# Altium PCB PCB.PcbDoc
Units mil, origin at the board's own origin, x right, y up, seen from the top; angles counter-clockwise.
Board outline 2500 x 2500 mil, 2 copper layers (Top Layer, Bottom Layer); 20 components, 37 nets, 102 pads, 98 vias.
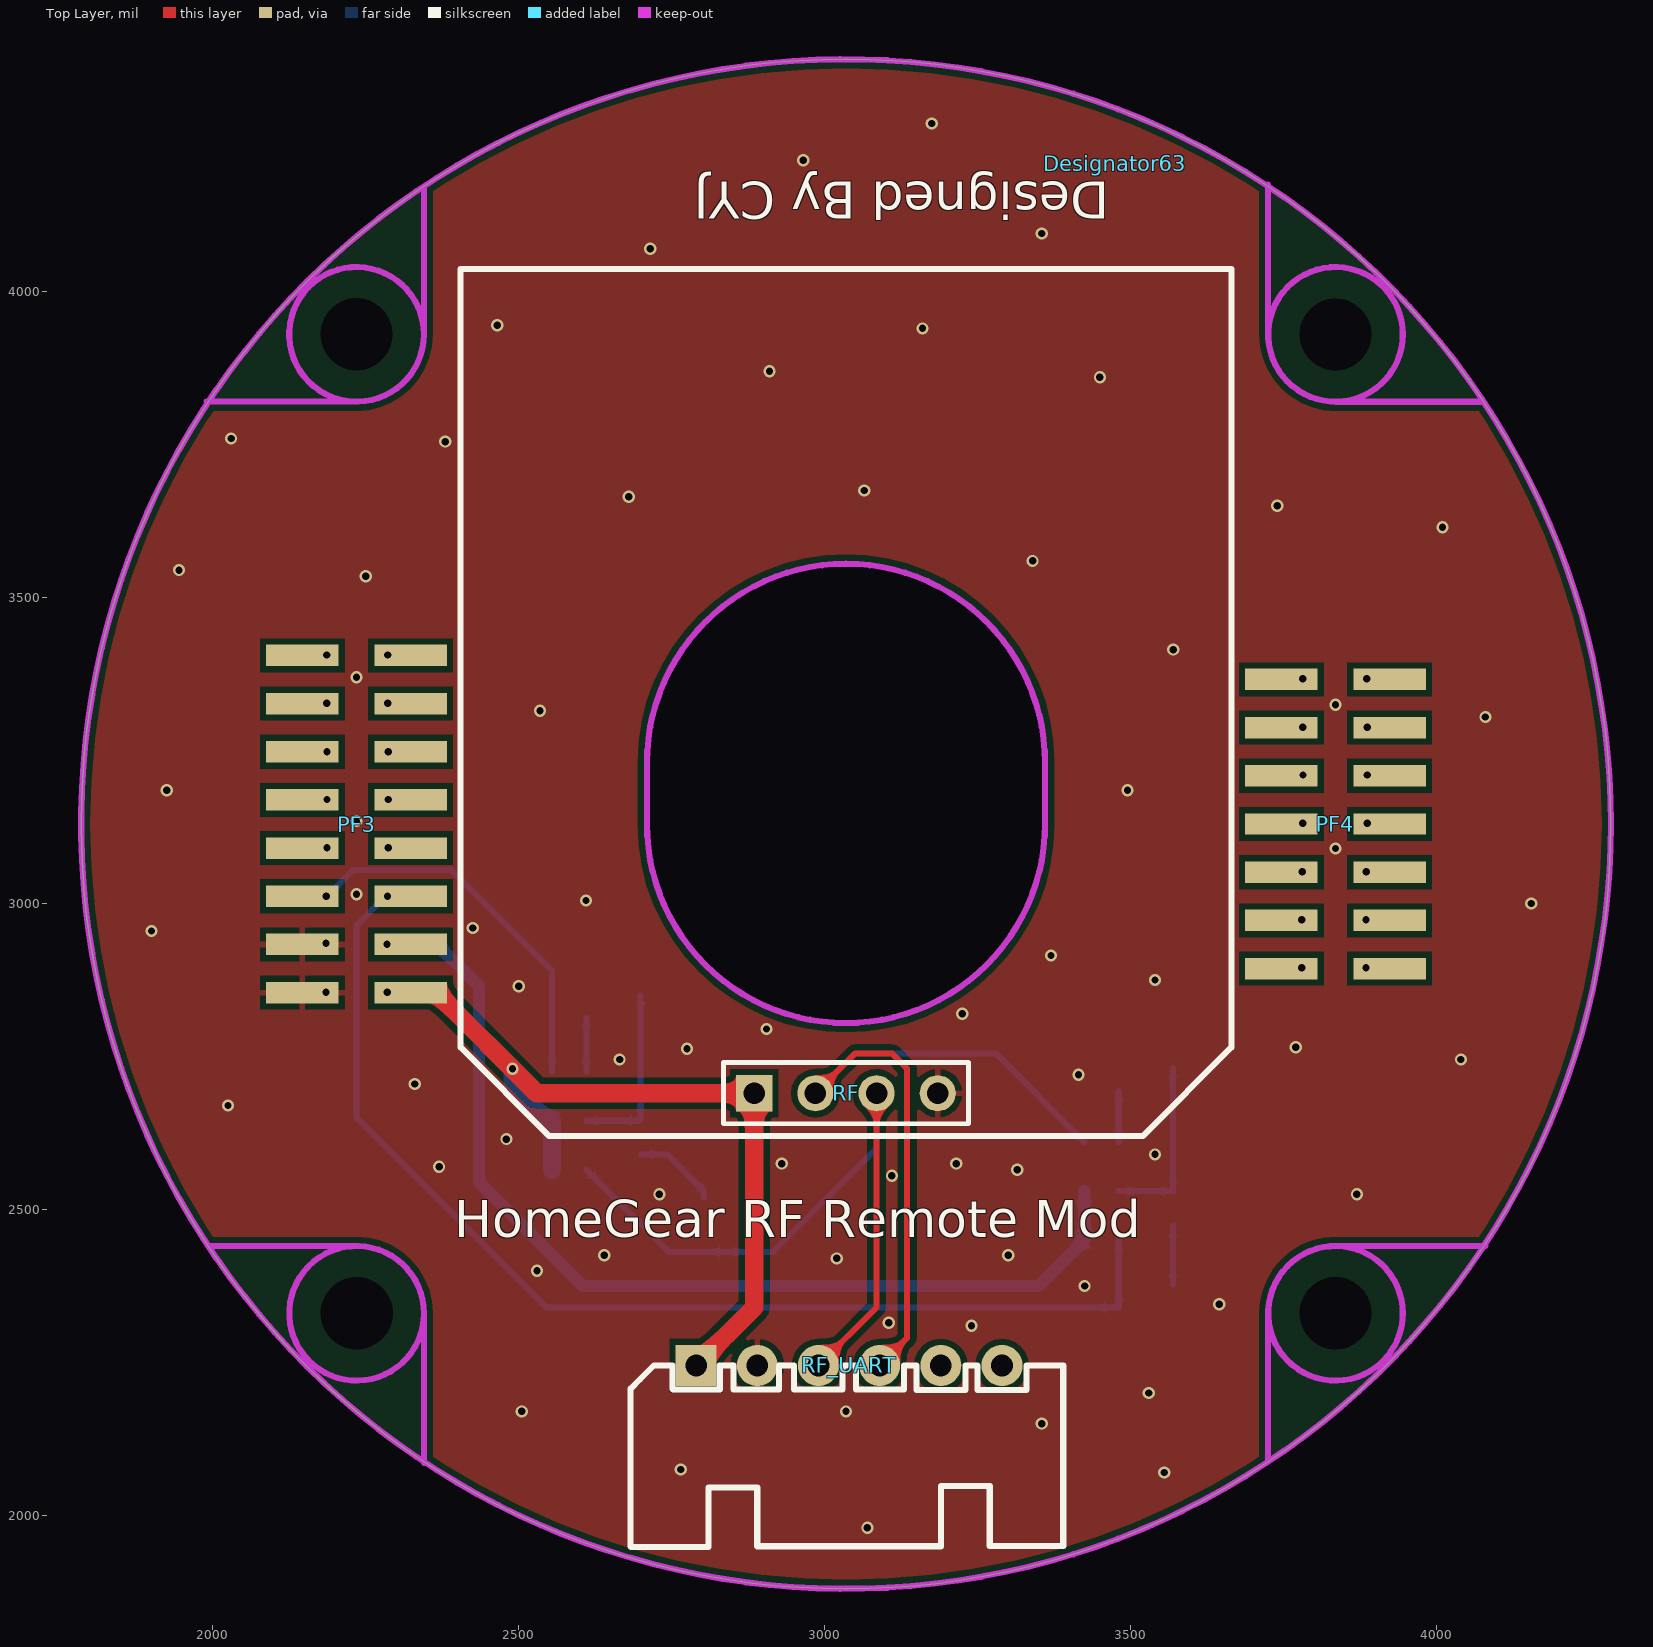
[diagram p0: Top Layer view]
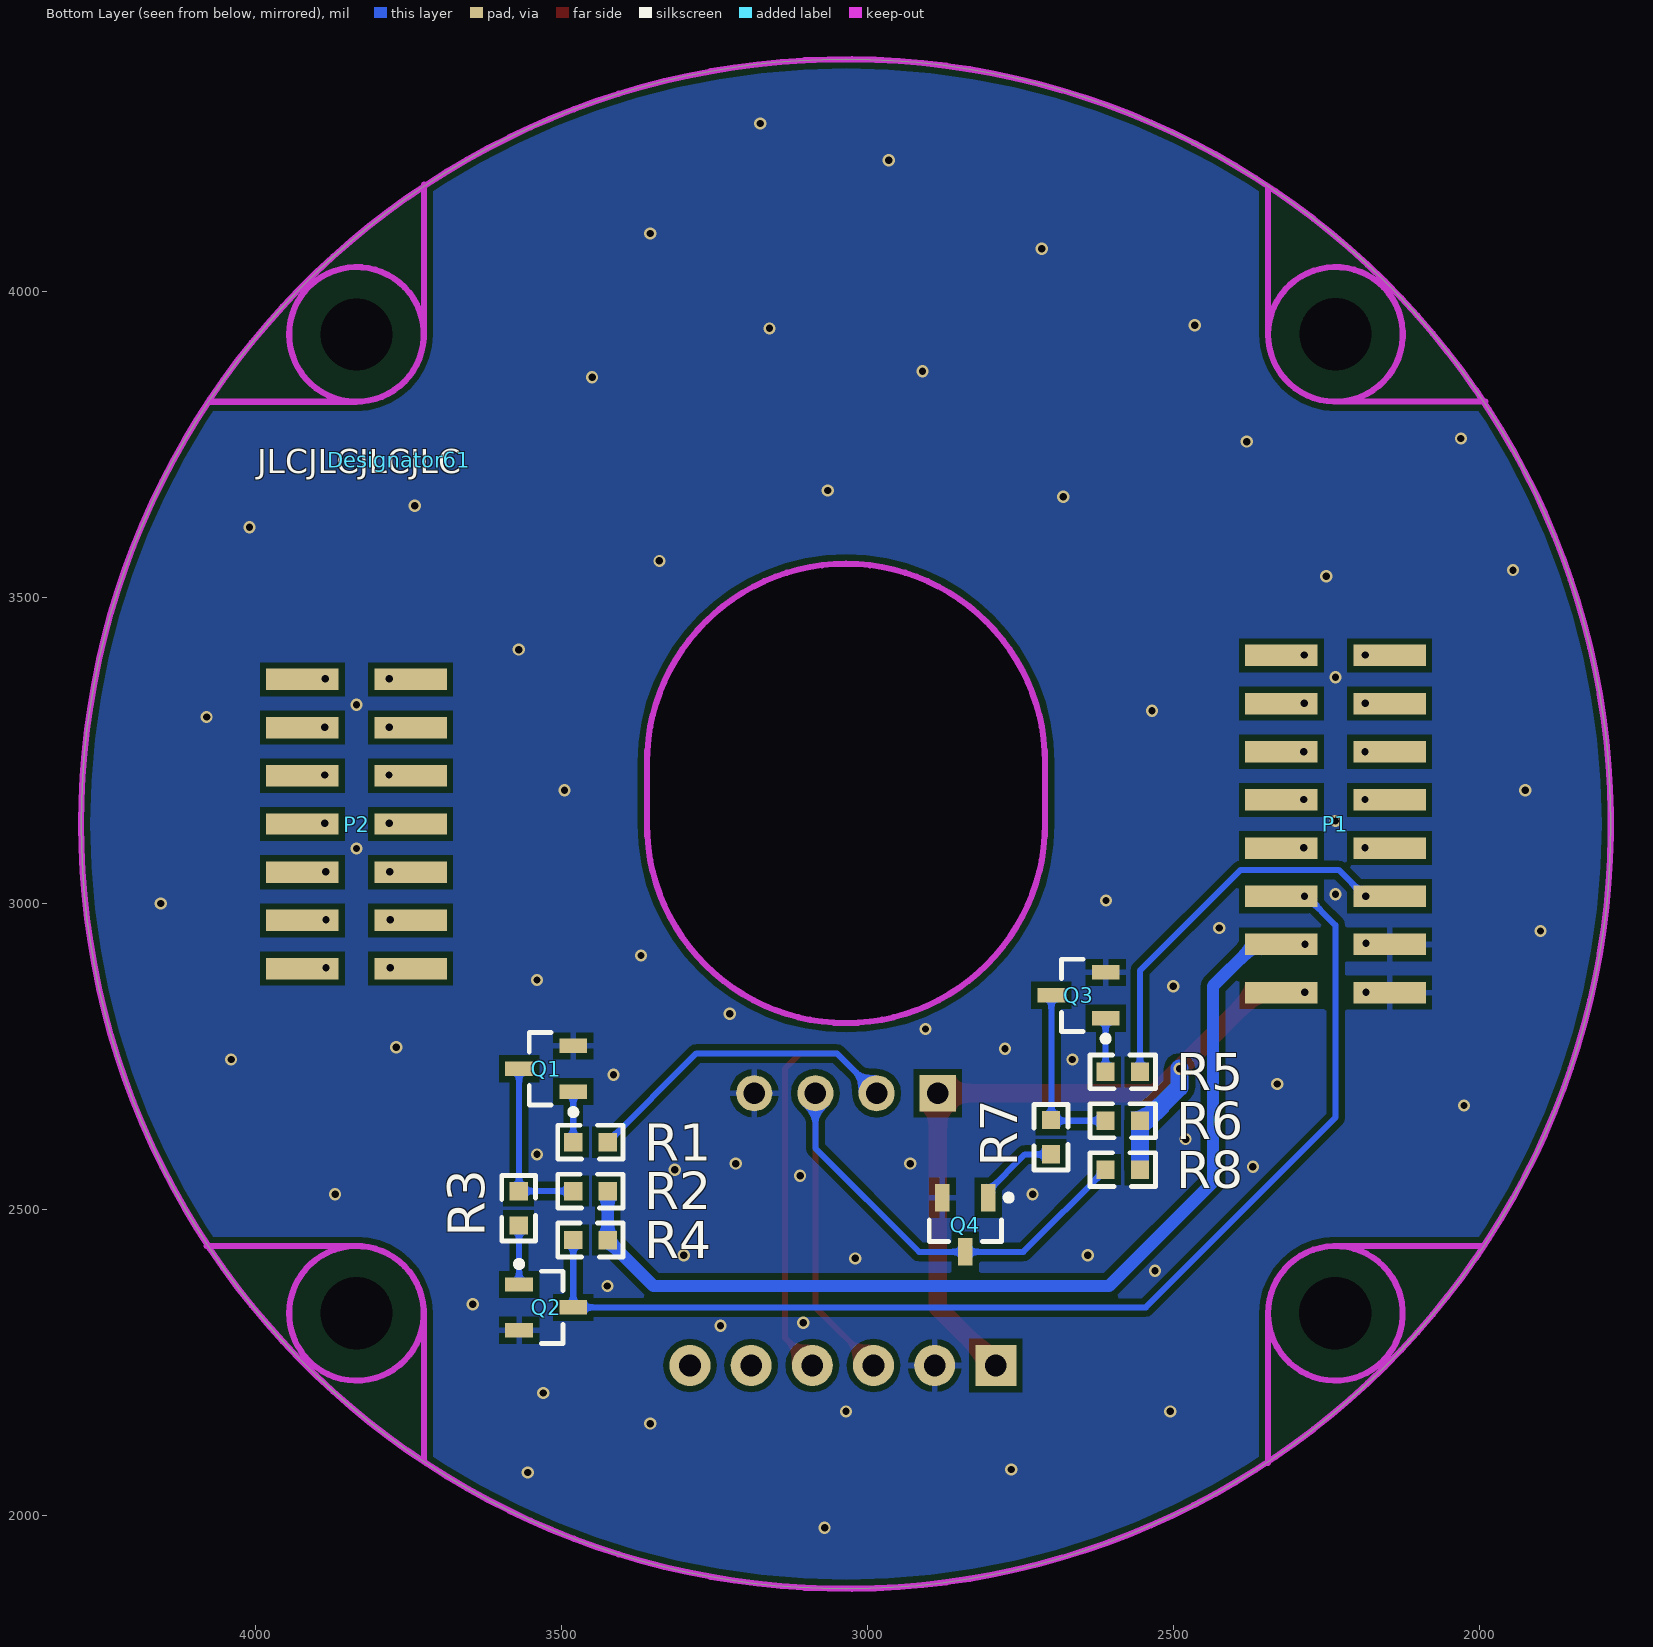
[diagram p1: Bottom Layer view, seen from below]
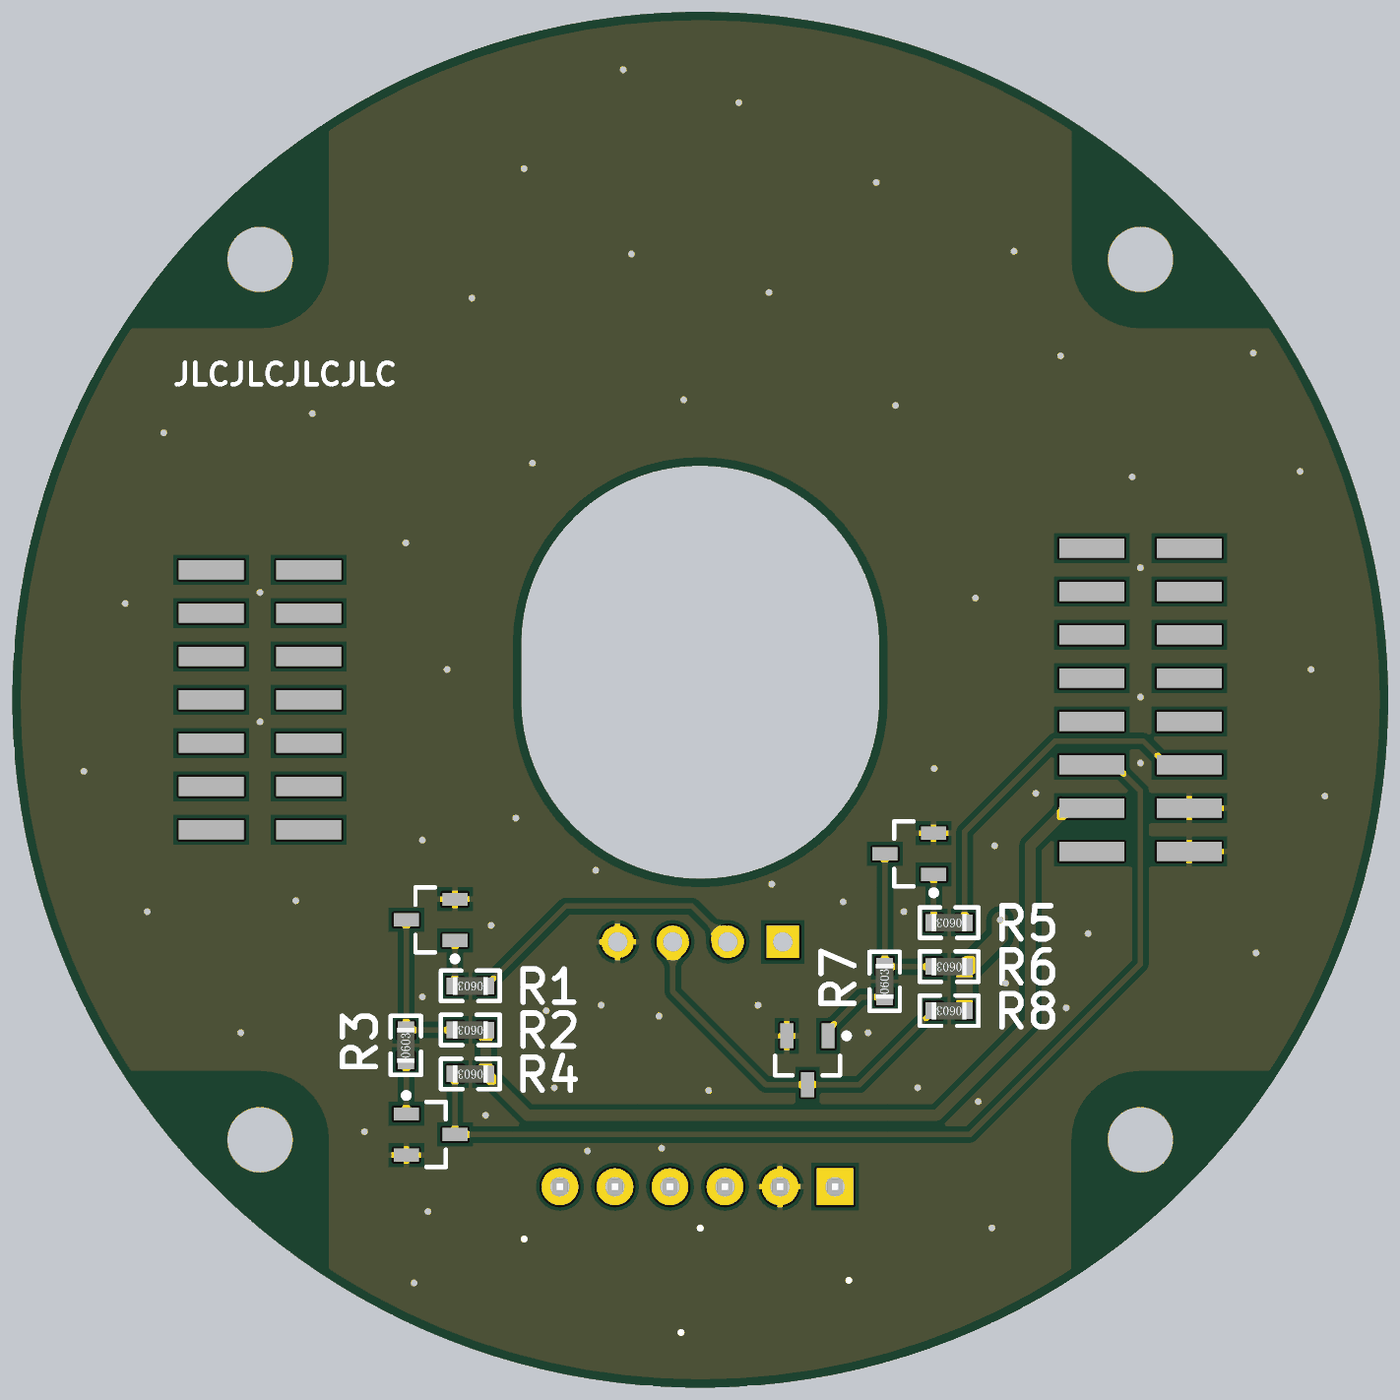
[diagram p2: 3D render of the assembled board from below, using the file's embedded part models]

## Layer stack, top to bottom
Top Solder: solder mask 0.4, Solder Resist, Dk 3.5
Top Layer: signal copper 1.4
Dielectric 1: dielectric 12.6, FR-4, Dk 4.8
Bottom Layer: signal copper 1.4
Bottom Solder: solder mask 0.4, Solder Resist, Dk 3.5

## Board outline
3035,1880 cw(c3035,3130) 1785,3130 cw(c3035,3130) 3035,4380 cw(c3035,3130) 4285,3130 cw(c3035,3130)
cut-out: 2709.65,3130 ccw(c3035,3130) 3360.35,3130 3360.35,3230 ccw(c3035,3230) 2709.65,3230

## Design rules (kind name [scope] priority, off if disabled: settings)
Clearance [All] p1: gap=10 ignorepadtopadclearanceinfootprint=FALSE except(0: Arc-Hole Track-Hole SMDPad-Hole THPad-Hole Via-Hole Fill-Hole Poly-Hole Region-Hole Text-Hole)
PolygonConnect [All] p1: thpad.connectstyle=Relief thpad.reliefconductorwidth=10 thpad.reliefentries=4 thpad.polygonreliefangle="90 Angle" thpad.airgapwidth=10 smdpad.connectstyle=Relief smdpad.reliefconductorwidth=10 smdpad.reliefentries=4 smdpad.polygonreliefangle="90 Angle" smdpad.airgapwidth=10 via.connectstyle=Direct via.reliefconductorwidth=10 via.reliefentries=4 via.polygonreliefangle="90 Angle" via.airgapwidth=10
RoutingVias [All] p1: holewidth=28 width=50 viastyle="Through Hole" minholewidth=28 minwidth=50 maxholewidth=28 maxwidth=50
SolderMaskExpansion [All] p1: expansion=4 istentingtop=FALSE
Width [All] p1: maxlimit=90 minlimit=10 preferedwidth=10 minimp=50.000000 maximp=50.000000 favimp=50.000000
30 further rules are at their usual default settings.

## Classes and differential pairs
component class Sheet: P1 P2 PF3 PF4 Q1 Q2 Q3 Q4 R1 R2 R3 R4 R5 R6 R7 R8 RF RF_UART

## Components (designator, comment, footprint, x,y, rotation, side; value= is the part's Value field where it differs from the comment)
Designator61 "Comment" JLC_CLI_NO 3765,3725 r180 bottom
Designator63 "Comment" DesignedByCYJ 3475,4210 r180 top
P1 "Header 8X2" SMD_PIN_HDR8x2_2.0MM 2235,3130 r270 bottom locked
P2 "Header 7X2" SMD_PIN_HDR7x2_2.0MM 3835,3130 r270 bottom locked
PF3 "Header 8X2" SMD_FEM_HDR8x2_2.0MM 2235,3130 r270 top locked
PF4 "Header 7X2" SMD_FEM_HDR7x2_2.0MM 3835,3130 r270 top locked
Q1 "MMBT3904" SOT-23B_N 3525,2730 r0 bottom
Q2 "MMBT3904" SOT-23B_N 3525,2340 r180 bottom
Q3 "MMBT3904" SOT-23B_N 2655,2850 r0 bottom
Q4 "MMBT3904" SOT-23B_N 2840,2475 r270 bottom
R1 "Res" My0603 3455,2610 r0 bottom value=2.2K
R2 "Res" My0603 3455,2530 r0 bottom value=10K
R3 "Res" My0603 3570,2504.2 r90 bottom value=1K
R4 "Res" My0603 3455,2450 r0 bottom value=10K
R5 "Res" My0603 2585,2725 r0 bottom value=2.2K
R6 "Res" My0603 2585,2645 r0 bottom value=10K
R7 "Res" My0603 2699.89,2620.44 r90 bottom value=1K
R8 "Res" My0603 2585,2565 r0 bottom value=10K
RF "RF_Serial" Serial_RF_Module 3035,2640 r0 top locked
RF_UART "DebugPort" XH2.54-WI-6P 3040,2245 r0 top

## Footprints (in the part's own frame and the unit in brackets; to place one, negate y for a bottom-side part, rotate by r counter-clockwise, add the part's x,y. Pads: shape width x height; smd on the part's side, far side on the other; paste and mask are expansions set on the pad)
DesignedByCYJ [mil]
JLC_CLI_NO [mil]
My0603 [mil]
  rect 30x30 smd: 1(-30.44,0.11) 2(25.8,0)
  silkscreen extent -56,-28 51,28, body extent -34,-16 29,16, height 18
Serial_RF_Module [mm]
  rect 1.5x1.5 hole 0.9: 1(-3.81,1.27)
  round 1.5 hole 0.9: 2(-1.27,1.27) 3(1.27,1.27) 4(3.81,1.27)
  silkscreen extent -16,-0.51 16,35.49
SMD_FEM_HDR7x2_2.0MM [mm]
  rect 0.89x3 smd: 1(-6,-2.25) 2(-6,2.25) 3(-4,-2.25) 4(-4,2.25) 5(-2,-2.25) 6(-2,2.25) 7(0,-2.25) 8(0,2.25) 9(2,-2.25) 10(2,2.25) 11(4,-2.25) 12(4,2.25) 13(6,-2.25) 14(6,2.25)
SMD_FEM_HDR8x2_2.0MM [mm]
  rect 0.89x3 smd: 1(-7,-2.25) 2(-7,2.25) 3(-5,-2.25) 4(-5,2.25) 5(-3,-2.25) 6(-3,2.25) 7(-1,-2.25) 8(-1,2.25) 9(1,-2.25) 10(1,2.25) 11(3,-2.25) 12(3,2.25) 13(5,-2.25) 14(5,2.25) 15(7,-2.25) 16(7,2.25)
SMD_PIN_HDR7x2_2.0MM [mm]
  rect 0.89x3 smd: 1(-6,2.25) 2(-6,-2.25) 3(-4,2.25) 4(-4,-2.25) 5(-2,2.25) 6(-2,-2.25) 7(0,2.25) 8(0,-2.25) 9(2,2.25) 10(2,-2.25) 11(4,2.25) 12(4,-2.25) 13(6,2.25) 14(6,-2.25)
SMD_PIN_HDR8x2_2.0MM [mm]
  rect 0.89x3 smd: 1(-7,2.25) 2(-7,-2.25) 3(-5,2.25) 4(-5,-2.25) 5(-3,2.25) 6(-3,-2.25) 7(-1,2.25) 8(-1,-2.25) 9(1,2.25) 10(1,-2.25) 11(3,2.25) 12(3,-2.25) 13(5,2.25) 14(5,-2.25) 15(7,2.25) 16(7,-2.25)
SOT-23B_N [mm] "SOT23, 3-Leads, Body 2.9x1.3mm, Pitch 0.95mm, Lead Span 2.4mm, IPC Medium Density"
  rect 1.15x0.6 smd: 1(-1.125,0.95) 2(-1.125,-0.95) 3(1.125,0)
  silkscreen extent -1.25,-1.5 0.7,1.92, body extent -0.7,-1.5 0.7,1.5, height 1.14
XH2.54-WI-6P [mm] "接插件，6P"
  rect 1.7x1.7 hole 0.9: 1(-6.35,0)
  round 1.7 hole 0.9: 2(-3.81,0) 3(-1.27,0) 4(1.27,0) 5(3.81,0) 6(6.35,0)
  silkscreen extent -9.07,-7.53 8.89,0, body extent -8.85,-7.35 8.85,0.35, height 5.75

## Part data
P1 PF3: "Header, 8-Pin, Dual row", LatestRevisionDate=17-Jul-2002, LatestRevisionNote="Re-released for DXP Platform.", Publisher="Altium Limited"
P2 PF4: "Header, 7-Pin, Dual row", LatestRevisionDate=17-Jul-2002, LatestRevisionNote="Re-released for DXP Platform.", Publisher="Altium Limited"
R1 R2 R3 R4 R5 R6 R7 R8: library part Res2, "Resistor", LatestRevisionDate=17-Jul-2002, LatestRevisionNote="Re-released for DXP Platform.", PackageDescription="Axial Device, Thru-Hole; 2 Leads; 0.4 in Pin Spacing", PackageReference=AXIAL-0.4, Published=8-Jun-2000, Publisher="Altium Limited"

## Free pads (board coordinates)
  round 0 hole 118.11: 2(2235,3930.25) 2(2235.21,2330.25) 2(3835,2330.25) 2(3835,3930.21)

## Via types
v1: diameter 20, hole 12, Top Layer to Bottom Layer, tented both sides, 68 vias
v2: diameter 18, hole 12, Top Layer to Bottom Layer, 30 vias

## Nets (pads, with @x,y where several pads share a name; then routed paths per layer and width w, separated by ;. In a path a pad name is that pad's centre, name@x,y a point inside that pad or via, vN(x,y) a via of type N, cw(c..) or ccw(c..) an arc to the next point about the centre after c; other vN are vias at no path point)
+3.3: P1.14 PF3.14 R2.1 R4.1 | length 1630.6
  Bottom Layer w20: P1.14 2331.1,2925.63 2374.37,2925.63 2435,2865 2435,2545 2605,2375 3349.68,2375 R4.1 R2.1
  other v2: 2284.89,2933.69
+5: P1.16 PF3.16 R6.1 R8.1 RF.1 RF_UART.1 | length 1311.3
  Top Layer w30: PF3.16 2365.12,2854.41 2529.53,2690 RF.1 2885,2340 RF_UART.1
  Bottom Layer w30: v1(2490,2730) 2490,2700 2545.11,2644.89 R6.1 R8.1
  other v2: 2285,2855
CS1: P2.7 PF4.7
  other v2: 3781.64,3131.38
GND: P1.13 P1.15 PF3.13 PF3.15 Q1.2 Q2.2 Q3.2 Q4.2 RF.4 RF_UART.2
  other v1: 3070,1980 3555,2070 2765,2075 3355,2150 2505,2170 3035,2170 3530,2200 3240,2310 3105,2315 3645,2345 3425,2375 2530,2400 3020,2420 2640,2425 3300,2425 2730,2525 3870,2525 3110,2555 3315,2565 2370,2570 2930,2575 3215,2575 3540,2590 2480,2615 2025,2670 2330,2705 3415,2720 2665,2745 4040,2745 2775.22,2762.77 3770,2765 2905,2795 3225,2820 2500,2865 3540,2875 3370,2915 1900,2955 2425,2960 4155,3000 2610,3005 2235,3015 3835,3090 2235,3135 1925,3185 3495,3185 4080,3305 2535,3315 3835,3325 2235,3370 3570,3415 2250,3535 1945,3545 3340,3560 4010,3615 3740,3650 2680,3665 3065,3675 2380,3755 2030,3760 3450,3860 2910,3870 3160,3940 2465,3945 2715,4070 3355,4095 2965,4215 3175,4275
  other v2: 2185,2855 2185,2935
IO0: P2.11 PF4.11
  other v2: 3779.89,2973.69
IO2: P2.14 PF4.14
  other v2: 3885,2895
IO4: P2.12 PF4.12
  other v2: 3884.89,2973.69
IO12: P1.11 PF3.11 R5.1 | length 659.7
  Bottom Layer w10: P1.11 2185.52,3011.89 2186.89,3011.89 2230,3055 2390,3055 2554.56,2890.44 R5.1
  other v2: 2185.52,3012.14
IO13: P1.12 PF3.12 Q2.3 R4.2 | length 1907.1
  Bottom Layer w10: P1.12 2282.05,3011.89 2235,2964.84 2235,2650 2545,2340 Q2.3 3480.71,2449.9 R4.2
  other v2: 2285.52,3012.14
IO14: P1.10 PF3.10
  other v2: 2286.64,3091.38
IO15: P2.13 PF4.13
  other v2: 3780,2895
IO25: P1.7 PF3.7
  other v2: 2186.8,3169.99
IO26: P1.8 PF3.8
  other v2: 2286.8,3169.99
IO27: P1.9 PF3.9
  other v2: 2186.64,3091.38
IO32: P1.5 PF3.5
  other v2: 2186.64,3248.27
IO33: P1.6 PF3.6
  other v2: 2286.64,3248.27
IO34: P1.3 PF3.3
  other v2: 2186.32,3327.52
IO35: P1.4 PF3.4
  other v2: 2286.32,3327.52
MISO: P2.5 PF4.5
  other v2: 3781.8,3209.99
MOSI: P2.2 PF4.2
  other v2: 3886.32,3367.52
NetQ1_1: Q1.1 R1.2 | length 82.6
  Bottom Layer w10: Q1.1 3480.71,2610.09 R1.2
NetQ1_3: Q1.3 R2.2 R3.2 | length 289.5
  Bottom Layer w10: R2.2 R3.2 3569.29,2530.71 Q1.3
NetQ2_1: Q2.1 R3.1 | length 96.7
  Bottom Layer w10: Q2.1 3569.29,2472.94 R3.1
NetQ3_1: Q3.1 R5.2 | length 87.6
  Bottom Layer w10: Q3.1 2610.71,2725.09 R5.2
NetQ3_3: Q3.3 R6.2 R7.2 | length 292.4
  Bottom Layer w10: R6.2 2697.45,2645 2699.29,2646.84 Q3.3
NetQ4_1: Q4.1 R7.1 | length 139.2
  Bottom Layer w10: R7.1 2742.72,2590 2802.6,2530.12 Q4.1 Q4.1@2801.89,2520
RF_RX: Q4.3 R8.2 RF.3 RF_UART.3 | length 1174.3
  Top Layer w10: RF_UART.3 3085,2340 RF.3
  Bottom Layer w10: R8.2 2745.09,2430.71 Q4.3 2915.71,2430.71 3085,2600 RF.3
RF_TX: R1.1 RF.2 RF_UART.4 | length 1217.5
  Top Layer w10: RF.2 3050,2755 3110,2755 3135,2730 3135,2290 RF_UART.4
  Bottom Layer w10: RF.2 3050,2755 3279.45,2755 R1.1
RXD0: P2.3 PF4.3
  other v2: 3781.64,3288.27
RXD1: P2.9 PF4.9
  other v2: 3780.52,3052.14
SCK: P2.8 PF4.8
  other v2: 3886.64,3131.38
SCL: P2.1 PF4.1
  other v2: 3781.32,3367.52
SDA: P2.6 PF4.6
  other v2: 3886.8,3209.99
SENSOR_VN: P1.2 PF3.2
  other v2: 2286.16,3406.12
SENSOR_VP: P1.1 PF3.1
  other v2: 2186.16,3406.12
TXD0: P2.4 PF4.4
  other v2: 3886.64,3288.27
TXD1: P2.10 PF4.10
  other v2: 3885.52,3052.14
pads on no net: RF_UART.5 RF_UART.6

## Polygon pours and split planes (outlines as drawn)
GND on Bottom Layer "NONET_L-01_P-001" (solid, remove dead copper, pour order 0): 1600.03,4217.07 2006.87,4623.91 4551.87,4623.91 4551.87,1763.91 4486.87,1698.91 1490.92,1698.91
GND on Top Layer "NONET_L-01_P-001" (solid, remove dead copper, pour order 2): 1545.94,4479.46 4315.94,4479.46 4495.94,4299.46 4495.94,1749.46 1545.94,1749.46 1505.94,1789.46
no net on Top Layer "NONET_L-01_P-001" (solid, pour order 1): 1685,4370

## Keep-outs
Keep-Out Layer:
  circle w10: c3035,3130 r1250
  circle w10: c2235,3930.25 r110
  circle w10: c3835,3930.21 r110
  circle w10: c3835,2330.25 r110
  circle w10: c2235.21,2330.25 r110
  lines w10: 1990.21,3820.25 2235,3820.25 ; 1995,2440.25 2235,2440.25 ; 2345,3930.46 2345,4170.46 ; 2345.21,2085.46 2345.21,2330.25 ; 3725,2090.04 3725,2330.04 ; 3725,3930.21 3725,4175 ; 3835,2440.25 4079.79,2440.25 ; 3835.21,3820.21 4075.21,3820.21 ; 2709.65,3130 ccw(c3035,3130) 3360.35,3130 3360.35,3230 ccw(c3035,3230) 2709.65,3230 2709.65,3130

## Silkscreen, mask and mechanical layers (free items; w line width, h text height)
Top Overlay:
  text "HomeGear RF Remote Mod" at 2395,2455 h60
Mechanical 1:
  circle w10: c3035,3130 r1250
  lines w10: 2709.65,3130 ccw(c3035,3130) 3360.35,3130 3360.35,3230 ccw(c3035,3230) 2709.65,3230 2709.65,3130

## Text inside footprints (layer, text, board x,y; h text height)
Designator61: Bottom Overlay "JLCJLCJLCJLC" at 3997.13,3702.87 h39.37
Designator63: Top Overlay "Designed By CYJ" at 3465,4180.01 h60 r180